# EAGLE board esp_ (EAGLE 7.5.0)
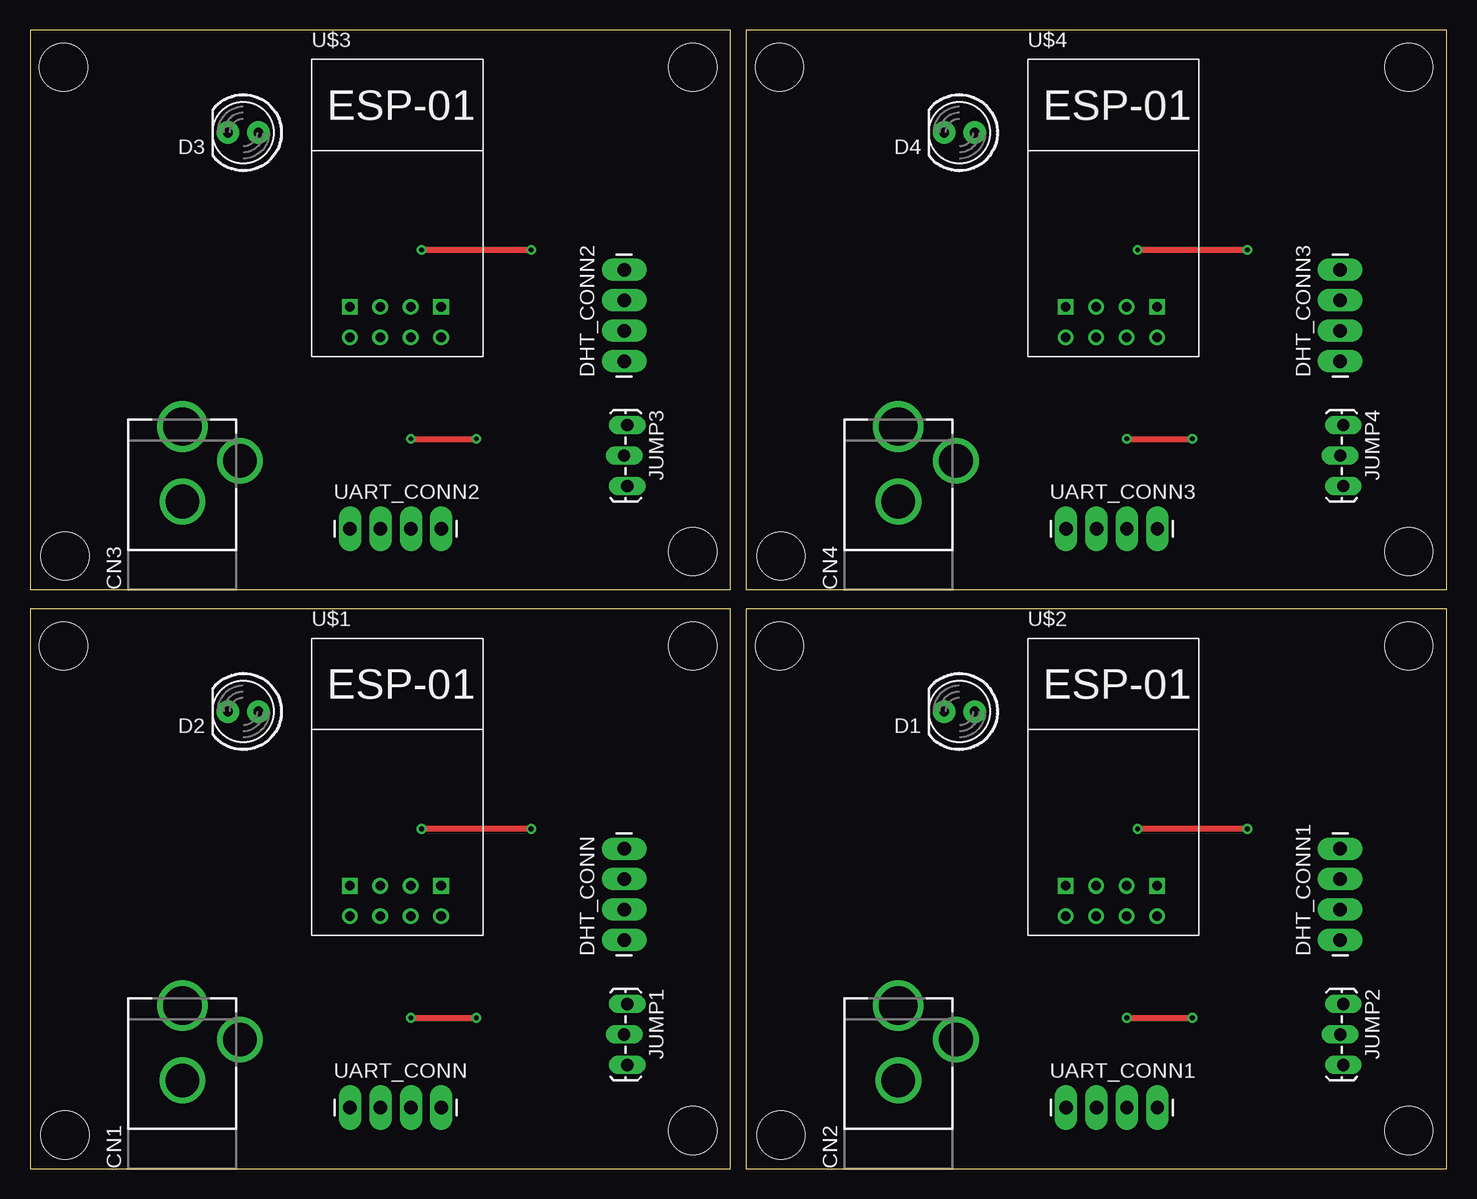
[diagram p0: board, top side]
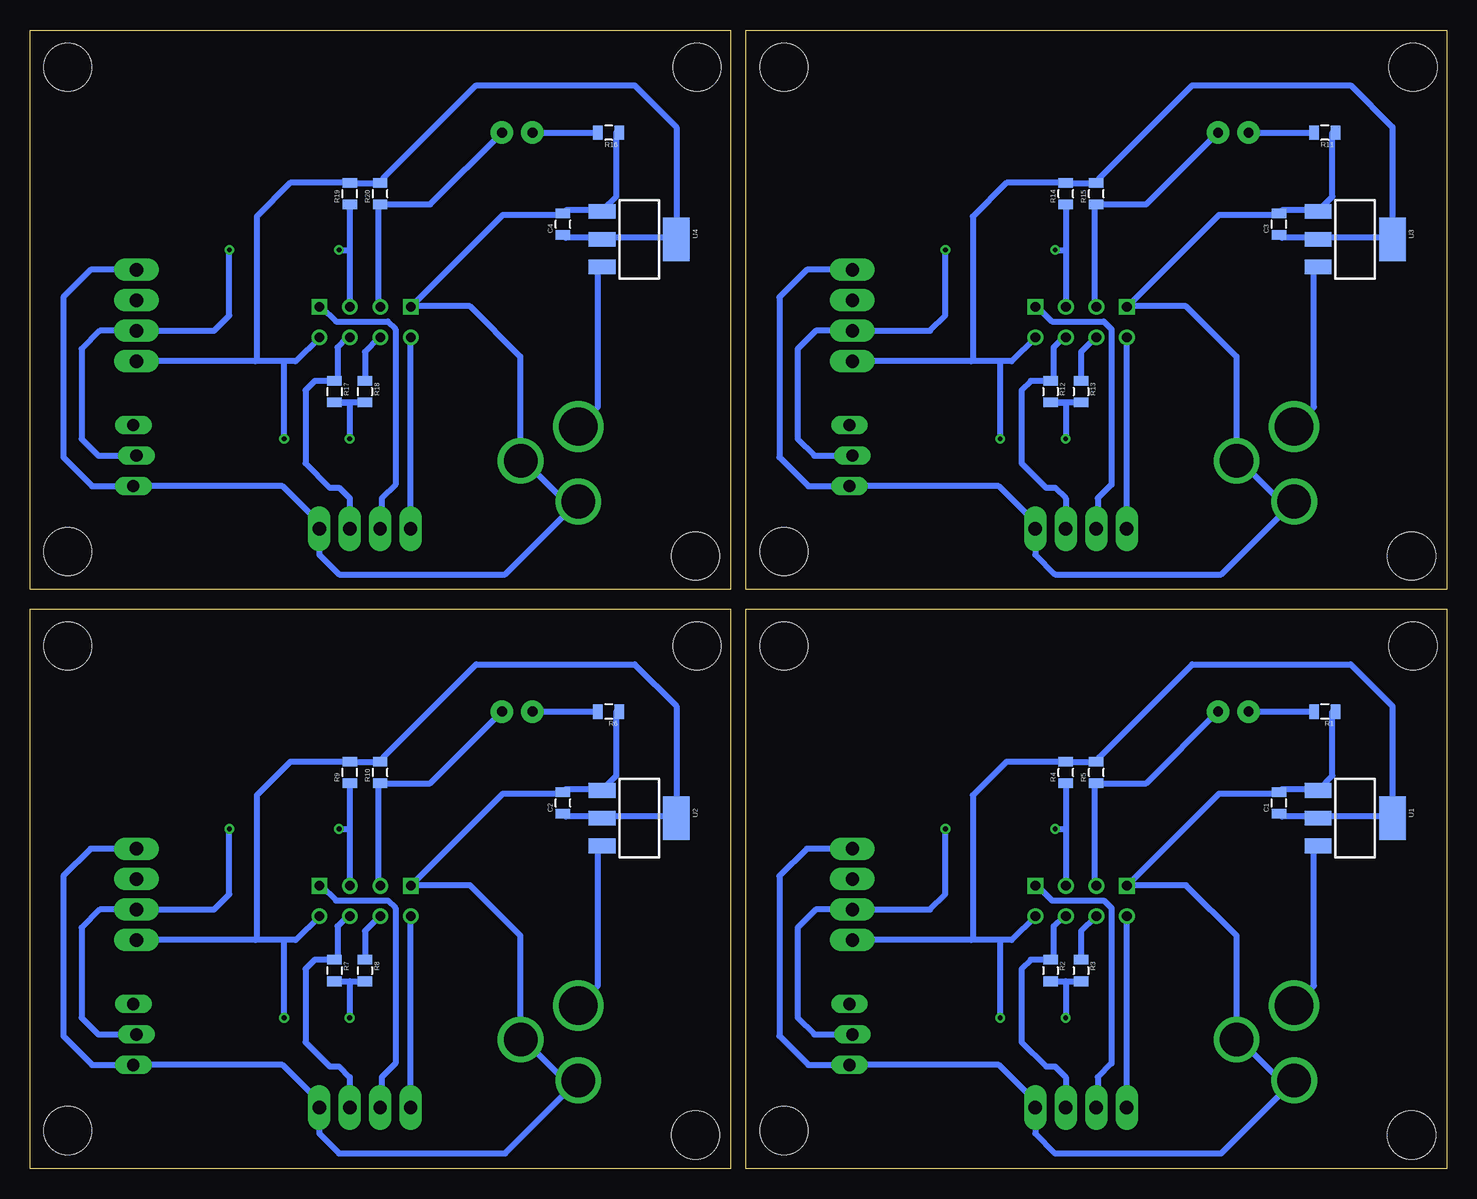
[diagram p1: board, bottom side, seen from below]

Size 118.09 x 94.92 mm. Coordinates in mm from the lower left corner, seen from the top.
Outline: 0,0 58.4,0 58.4,46.66 0,46.66 0,0
Outline: 59.69,0 118.09,0 118.09,46.66 59.69,46.66 59.69,0
Outline: 0,48.26 58.4,48.26 58.4,94.92 0,94.92 0,48.26
Outline: 59.69,48.26 118.09,48.26 118.09,94.92 59.69,94.92 59.69,48.26
Copper layers (1*16): Top 0.035mm / dielectric 1.5mm / Bottom 0.035mm
Design rules "default": minimum track width 10mil, minimum drill 24mil, track to track 8mil, track to pad 8mil, pad to pad 8mil, via to via 8mil, smd to smd 8mil, copper to edge 40mil, drill to drill 8mil, minimum pad ring 10mil, minimum via ring 8mil, stop-mask expansion 4mil, vias tented up to drill 0mil, thermal gap 10mil
Net classes: 0 default: width 0.508 mm, drill 0.254 mm, clearance 0.254 mm
Holes 4 mm at 2.79,43.56 55.24,43.56 55.24,3.17 2.92,2.79 62.48,43.56 114.94,43.56 114.94,3.17 62.61,2.79 2.79,91.82 55.24,91.82 55.24,51.44 2.92,51.05 62.48,91.82 114.94,91.82 114.94,51.44 62.61,51.05

## Footprints (pad centres in the part's own frame; a part is rotated, then mirrored left to right if it is on the bottom)
0805 = smd 0.8 x 1.2: 1 -0.9,0; 2 0.9,0
DCJACK_2MM_PTH = drill 2.8: GND 0,7.35; GNDBREAK 4.8,10.75 | drill 3.2: PWR 0,13.6
LED5MM = drill 0.813 pad 1.88: A -1.27,0; K 1.27,0
1X04_LONGPADS = drill 1.118 pad 1.88 long: 1 0,0; 2 2.54,0; 3 5.08,0; 4 7.62,0
1X03_LOCK_LONGPADS = drill 1.016 long: 1 0,0; 2 2.54,-0.254; 3 5.08,0
SOT223 = smd 1.219 x 2.235: 1 -2.311,-3.099; 2 0,-3.099; 3 2.311,-3.099 | smd 3.6 x 2.2: 4 0,3.099
ESP01 = drill 0.8: CH_PD -1.285,-8.178; GPIO0 1.255,-5.638; GPIO2 -1.285,-5.638; RST 1.255,-8.178; TX -3.825,-8.178; VCC 3.795,-8.178 | drill 0.8 square: GND -3.825,-5.638; RX 3.795,-5.638

## Placement (x,y rotation side)
C1  [0805]  13.97,30.48 90 bottom
C2  [0805]  73.66,30.48 90 bottom
C3  [0805]  13.97,78.74 90 bottom
C4  [0805]  73.66,78.74 90 bottom
CN1  [DCJACK_2MM_PTH]  12.7,0 0 top
CN2  [DCJACK_2MM_PTH]  72.39,0 0 top
CN3  [DCJACK_2MM_PTH]  12.7,48.26 0 top
CN4  [DCJACK_2MM_PTH]  72.39,48.26 0 top
D1  [LED5MM]  77.47,38.1 180 top
D2  [LED5MM]  17.78,38.1 180 top
D3  [LED5MM]  17.78,86.36 180 top
D4  [LED5MM]  77.47,86.36 180 top
DHT_CONN  [1X04_LONGPADS]  49.53,19.05 90 top
DHT_CONN1  [1X04_LONGPADS]  109.22,19.05 90 top
DHT_CONN2  [1X04_LONGPADS]  49.53,67.31 90 top
DHT_CONN3  [1X04_LONGPADS]  109.22,67.31 90 top
JUMP1  [1X03_LOCK_LONGPADS]  49.78,13.72 270 top
JUMP2  [1X03_LOCK_LONGPADS]  109.47,13.72 270 top
JUMP3  [1X03_LOCK_LONGPADS]  49.78,61.98 270 top
JUMP4  [1X03_LOCK_LONGPADS]  109.47,61.98 270 top
R1  100  [0805]  10.16,38.1 180 bottom
R2  4.7k  [0805]  33.02,16.51 270 bottom
R3  4.7k  [0805]  30.48,16.51 270 bottom
R4  4.7k  [0805]  31.75,33.02 90 bottom
R5  4.7k  [0805]  29.21,33.02 90 bottom
R6  100  [0805]  69.85,38.1 180 bottom
R7  4.7k  [0805]  92.71,16.51 270 bottom
R8  4.7k  [0805]  90.17,16.51 270 bottom
R9  4.7k  [0805]  91.44,33.02 90 bottom
R10  4.7k  [0805]  88.9,33.02 90 bottom
R11  100  [0805]  10.16,86.36 180 bottom
R12  4.7k  [0805]  33.02,64.77 270 bottom
R13  4.7k  [0805]  30.48,64.77 270 bottom
R14  4.7k  [0805]  31.75,81.28 90 bottom
R15  4.7k  [0805]  29.21,81.28 90 bottom
R16  100  [0805]  69.85,86.36 180 bottom
R17  4.7k  [0805]  92.71,64.77 270 bottom
R18  4.7k  [0805]  90.17,64.77 270 bottom
R19  4.7k  [0805]  91.44,81.28 90 bottom
R20  4.7k  [0805]  88.9,81.28 90 bottom
U1  [SOT223]  7.62,29.21 270 bottom
U2  [SOT223]  67.31,29.21 270 bottom
U3  [SOT223]  7.62,77.47 270 bottom
U4  [SOT223]  67.31,77.47 270 bottom
U$1  ESP01  [ESP01]  30.48,29.21 0 top
U$2  ESP01  [ESP01]  90.17,29.21 0 top
U$3  ESP01  [ESP01]  30.48,77.47 0 top
U$4  ESP01  [ESP01]  90.17,77.47 0 top
UART_CONN  [1X04_LONGPADS]  26.67,5.08 0 top
UART_CONN1  [1X04_LONGPADS]  86.36,5.08 0 top
UART_CONN2  [1X04_LONGPADS]  26.67,53.34 0 top
UART_CONN3  [1X04_LONGPADS]  86.36,53.34 0 top

## Library data of the parts
C1-C4 = SparkFun-Capacitors
CN1-CN4 = adafruit
D1-D4 = SparkFun-LED
DHT_CONN DHT_CONN1-DHT_CONN3 UART_CONN UART_CONN1-UART_CONN3 = SparkFun-Connectors; PROD_ID: CONN-09696
JUMP1-JUMP4 = SparkFun-Connectors
R1-R20 = SparkFun-Resistors
U1-U4 = SparkFun-PowerIC; PROD_ID: VREG-08170
U$1-U$4 = esp8266modules

## Nets
3.3V: C1.1 DHT_CONN.1 R2.2 R3.2 R4.2 R5.2 U1.2 U1.4 U$1.VCC
3.3V1: C2.1 DHT_CONN1.1 R7.2 R8.2 R9.2 R10.2 U2.2 U2.4 U$2.VCC
3.3V2: C3.1 DHT_CONN2.1 R12.2 R13.2 R14.2 R15.2 U3.2 U3.4 U$3.VCC
3.3V3: C4.1 DHT_CONN3.1 R17.2 R18.2 R19.2 R20.2 U4.2 U4.4 U$4.VCC
CH_PD: R3.1 U$1.CH_PD
CH_PD1: R8.1 U$2.CH_PD
CH_PD2: R13.1 U$3.CH_PD
CH_PD3: R18.1 U$4.CH_PD
GND: C1.2 CN1.GND CN1.GNDBREAK DHT_CONN.4 JUMP1.3 R1.1 U1.1 U$1.GND UART_CONN.4
GND1: C2.2 CN2.GND CN2.GNDBREAK DHT_CONN1.4 JUMP2.3 R6.1 U2.1 U$2.GND UART_CONN1.4
GND2: C3.2 CN3.GND CN3.GNDBREAK DHT_CONN2.4 JUMP3.3 R11.1 U3.1 U$3.GND UART_CONN2.4
GND3: C4.2 CN4.GND CN4.GNDBREAK DHT_CONN3.4 JUMP4.3 R16.1 U4.1 U$4.GND UART_CONN3.4
GPIO0: DHT_CONN.2 JUMP1.2 R4.1 U$1.GPIO0
GPIO1: DHT_CONN1.2 JUMP2.2 R9.1 U$2.GPIO0
GPIO2: D2.A R5.1 U$1.GPIO2
GPIO3: D1.A R10.1 U$2.GPIO2
GPIO4: DHT_CONN2.2 JUMP3.2 R14.1 U$3.GPIO0
GPIO5: D3.A R15.1 U$3.GPIO2
GPIO6: DHT_CONN3.2 JUMP4.2 R19.1 U$4.GPIO0
GPIO7: D4.A R20.1 U$4.GPIO2
N$1: D2.K R1.2
N$2: D1.K R6.2
N$3: JUMP1.1
N$4: JUMP2.1
N$5: D3.K R11.2
N$6: JUMP3.1
N$7: D4.K R16.2
N$8: JUMP4.1
NC: DHT_CONN.3
NC1: DHT_CONN1.3
NC2: DHT_CONN2.3
NC3: DHT_CONN3.3
RESET: R2.1 U$1.RST UART_CONN.3
RESET1: R7.1 U$2.RST UART_CONN1.3
RESET2: R12.1 U$3.RST UART_CONN2.3
RESET3: R17.1 U$4.RST UART_CONN3.3
RX: U$1.RX UART_CONN.2
RX1: U$2.RX UART_CONN1.2
RX2: U$3.RX UART_CONN2.2
RX3: U$4.RX UART_CONN3.2
TX: U$1.TX UART_CONN.1
TX1: U$2.TX UART_CONN1.1
TX2: U$3.TX UART_CONN2.1
TX3: U$4.TX UART_CONN3.1
VCC: CN1.PWR U1.3
VCC1: CN2.PWR U2.3
VCC2: CN3.PWR U3.3
VCC3: CN4.PWR U4.3

## Tracks (layer width: path | path; a pad name or v marks a point on that pad's centre or on a via)
3.3V  (via drill 0.4 pad 0.5)
  Top 0.508: v31.75,12.57 v37.21,12.57
  Bottom 0.508: R3.2 30.48,15.62 32.77,15.62 R2.2 31.75,15.61 v31.75,12.57 | C1.1 13.72,29.34 11.05,29.34 U1.2 10.67,29.34 4.57,29.34 U1.4 4.52,38.56 8,42.04 21.21,42.04 28.96,34.29 R5.2 29.34,33.91 31.62,33.91 R4.2 36.69,33.92 39.5,31.11 39.5,19.18 39.62,19.05 | U$1.VCC 36.26,19.05 37.21,19.05 | 37.21,19.05 39.62,19.05 | 39.62,19.05 DHT_CONN.1 | v37.21,12.57 37.21,19.05
3.3V1  (via drill 0.4 pad 0.5)
  Top 0.508: v91.44,12.57 v96.9,12.57
  Bottom 0.508: R8.2 90.17,15.62 92.46,15.62 R7.2 91.44,15.61 v91.44,12.57 | C2.1 73.41,29.34 70.74,29.34 U2.2 70.36,29.34 64.26,29.34 U2.4 64.21,38.56 67.69,42.04 80.9,42.04 88.65,34.29 R10.2 89.03,33.91 91.31,33.91 R9.2 96.38,33.92 99.19,31.11 99.19,19.18 99.31,19.05 | U$2.VCC 95.95,19.05 96.9,19.05 | 96.9,19.05 99.31,19.05 | 99.31,19.05 DHT_CONN1.1 | v96.9,12.57 96.9,19.05
3.3V2  (via drill 0.4 pad 0.5)
  Top 0.508: v31.75,60.83 v37.21,60.83
  Bottom 0.508: R13.2 30.48,63.88 32.77,63.88 R12.2 31.75,63.87 v31.75,60.83 | C3.1 13.72,77.6 11.05,77.6 U3.2 10.67,77.6 4.57,77.6 U3.4 4.52,86.82 8,90.3 21.21,90.3 28.96,82.55 R15.2 29.34,82.17 31.62,82.17 R14.2 36.69,82.18 39.5,79.38 39.5,67.44 39.62,67.31 | U$3.VCC 36.26,67.31 37.21,67.31 | 37.21,67.31 39.62,67.31 | 39.62,67.31 DHT_CONN2.1 | v37.21,60.83 37.21,67.31
3.3V3  (via drill 0.4 pad 0.5)
  Top 0.508: v91.44,60.83 v96.9,60.83
  Bottom 0.508: R18.2 90.17,63.88 92.46,63.88 R17.2 91.44,63.87 v91.44,60.83 | C4.1 73.41,77.6 70.74,77.6 U4.2 70.36,77.6 64.26,77.6 U4.4 64.21,86.82 67.69,90.3 80.9,90.3 88.65,82.55 R20.2 89.03,82.17 91.31,82.17 R19.2 96.38,82.18 99.19,79.38 99.19,67.44 99.31,67.31 | U$4.VCC 95.95,67.31 96.9,67.31 | 96.9,67.31 99.31,67.31 | 99.31,67.31 DHT_CONN3.1 | v96.9,60.83 96.9,67.31
CH_PD
  Bottom 0.508: R3.1 30.48,19.81 29.34,20.95 U$1.CH_PD
CH_PD1
  Bottom 0.508: R8.1 90.17,19.81 89.03,20.95 U$2.CH_PD
CH_PD2
  Bottom 0.508: R13.1 30.48,68.07 29.34,69.21 U$3.CH_PD
CH_PD3
  Bottom 0.508: R18.1 90.17,68.07 89.03,69.21 U$4.CH_PD
GND
  Bottom 0.508: R1.1 9.53,38.1 9.53,32.77 10.67,31.62 U1.1 11.05,31.62 13.72,31.62 C1.2 14.1,31.24 18.98,31.24 U$1.GND 26.29,23.62 21.72,23.62 17.53,19.43 17.53,11.05 CN1.GNDBREAK 17.14,10.67 14.1,7.62 12.95,7.62 CN1.GND 18.78,1.27 32.64,1.27 34.29,2.92 UART_CONN.4 34.29,5.59 37.34,8.64 JUMP1.3 53.21,8.64 55.63,11.05 55.63,24.38 53.34,26.67 DHT_CONN.4
GND1
  Bottom 0.508: R6.1 69.22,38.1 69.22,32.77 70.36,31.62 U2.1 70.74,31.62 73.41,31.62 C2.2 73.79,31.24 78.67,31.24 U$2.GND 85.98,23.62 81.41,23.62 77.22,19.43 77.22,11.05 CN2.GNDBREAK 76.83,10.67 73.79,7.62 72.64,7.62 CN2.GND 78.47,1.27 92.33,1.27 93.98,2.92 UART_CONN1.4 93.98,5.59 97.03,8.64 JUMP2.3 112.9,8.64 115.32,11.05 115.32,24.38 113.03,26.67 DHT_CONN1.4
GND2
  Bottom 0.508: R11.1 9.53,86.36 9.53,81.03 10.67,79.88 U3.1 11.05,79.88 13.72,79.88 C3.2 14.1,79.5 18.98,79.5 U$3.GND 26.29,71.88 21.72,71.88 17.53,67.69 17.53,59.31 CN3.GNDBREAK 17.14,58.93 14.1,55.88 12.95,55.88 CN3.GND 18.78,49.53 32.64,49.53 34.29,51.18 UART_CONN2.4 34.29,53.85 37.34,56.9 JUMP3.3 53.21,56.9 55.63,59.31 55.63,72.64 53.34,74.93 DHT_CONN2.4
GND3
  Bottom 0.508: R16.1 69.22,86.36 69.22,81.03 70.36,79.88 U4.1 70.74,79.88 73.41,79.88 C4.2 73.79,79.5 78.67,79.5 U$4.GND 85.98,71.88 81.41,71.88 77.22,67.69 77.22,59.31 CN4.GNDBREAK 76.83,58.93 73.79,55.88 72.64,55.88 CN4.GND 78.47,49.53 92.33,49.53 93.98,51.18 UART_CONN3.4 93.98,53.85 97.03,56.9 JUMP4.3 112.9,56.9 115.32,59.31 115.32,72.64 113.03,74.93 DHT_CONN3.4
GPIO0  (via drill 0.4 pad 0.5)
  Top 0.508: v41.78,28.32 v32.64,28.32
  Bottom 0.508: JUMP1.2 52.7,11.18 54.1,12.57 54.1,20.07 52.58,21.59 DHT_CONN.2 43.05,21.59 41.78,22.86 v41.78,28.32 | R4.1 31.75,28.32 | 31.75,28.32 31.75,23.59 U$1.GPIO0 | v32.64,28.32 31.75,28.32
GPIO1  (via drill 0.4 pad 0.5)
  Top 0.508: v101.47,28.32 v92.33,28.32
  Bottom 0.508: JUMP2.2 112.39,11.18 113.79,12.57 113.79,20.07 112.27,21.59 DHT_CONN1.2 102.74,21.59 101.47,22.86 v101.47,28.32 | R9.1 91.44,28.32 | 91.44,28.32 91.44,23.59 U$2.GPIO0 | v92.33,28.32 91.44,28.32
GPIO2
  Bottom 0.508: U$1.GPIO2 29.34,23.62 29.34,32 R5.1 25.03,32.12 D2.A
GPIO3
  Bottom 0.508: U$2.GPIO2 89.03,23.62 89.03,32 R10.1 84.72,32.12 D1.A
GPIO4  (via drill 0.4 pad 0.5)
  Top 0.508: v41.78,76.58 v32.64,76.58
  Bottom 0.508: JUMP3.2 52.7,59.44 54.1,60.83 54.1,68.33 52.58,69.85 DHT_CONN2.2 43.05,69.85 41.78,71.12 v41.78,76.58 | R14.1 31.75,76.58 | 31.75,76.58 31.75,71.85 U$3.GPIO0 | v32.64,76.58 31.75,76.58
GPIO5
  Bottom 0.508: U$3.GPIO2 29.34,71.88 29.34,80.26 R15.1 25.03,80.38 D3.A
GPIO6  (via drill 0.4 pad 0.5)
  Top 0.508: v101.47,76.58 v92.33,76.58
  Bottom 0.508: JUMP4.2 112.39,59.44 113.79,60.83 113.79,68.33 112.27,69.85 DHT_CONN3.2 102.74,69.85 101.47,71.12 v101.47,76.58 | R19.1 91.44,76.58 | 91.44,76.58 91.44,71.85 U$4.GPIO0 | v92.33,76.58 91.44,76.58
GPIO7
  Bottom 0.508: U$4.GPIO2 89.03,71.88 89.03,80.26 R20.1 84.72,80.38 D4.A
N$1
  Bottom 0.508: D2.K R1.2
N$2
  Bottom 0.508: D1.K R6.2
N$5
  Bottom 0.508: D3.K R11.2
N$7
  Bottom 0.508: D4.K R16.2
RESET
  Bottom 0.508: U$1.RST 32,20.95 32.77,20.19 32.77,17.53 R2.1 34.66,17.41 35.43,16.64 35.43,10.54 33.4,8.51 32.64,8.51 31.75,7.62 UART_CONN.3
RESET1
  Bottom 0.508: U$2.RST 91.69,20.95 92.46,20.19 92.46,17.53 R7.1 94.35,17.41 95.12,16.64 95.12,10.54 93.09,8.51 92.33,8.51 91.44,7.62 UART_CONN1.3
RESET2
  Bottom 0.508: U$3.RST 32,69.21 32.77,68.45 32.77,65.79 R12.1 34.66,65.67 35.43,64.9 35.43,58.8 33.4,56.77 32.64,56.77 31.75,55.88 UART_CONN2.3
RESET3
  Bottom 0.508: U$4.RST 91.69,69.21 92.46,68.45 92.46,65.79 R17.1 94.35,65.67 95.12,64.9 95.12,58.8 93.09,56.77 92.33,56.77 91.44,55.88 UART_CONN3.3
RX
  Bottom 0.508: U$1.RX 34.11,23.57 32.89,22.35 28.57,22.35 27.94,21.72 27.94,8.76 29.08,7.62 29.08,5.21 UART_CONN.2
RX1
  Bottom 0.508: U$2.RX 93.8,23.57 92.58,22.35 88.27,22.35 87.63,21.72 87.63,8.76 88.77,7.62 88.77,5.21 UART_CONN1.2
RX2
  Bottom 0.508: U$3.RX 34.11,71.83 32.89,70.61 28.57,70.61 27.94,69.98 27.94,57.02 29.08,55.88 29.08,53.47 UART_CONN2.2
RX3
  Bottom 0.508: U$4.RX 93.8,71.83 92.58,70.61 88.27,70.61 87.63,69.98 87.63,57.02 88.77,55.88 88.77,53.47 UART_CONN3.2
TX
  Bottom 0.508: UART_CONN.1 26.67,20.95 U$1.TX
TX1
  Bottom 0.508: UART_CONN1.1 86.36,20.95 U$2.TX
TX2
  Bottom 0.508: UART_CONN2.1 26.67,69.21 U$3.TX
TX3
  Bottom 0.508: UART_CONN3.1 86.36,69.21 U$4.TX
VCC
  Bottom 0.508: U1.3 11.05,26.67 11.05,15.24 12.57,13.72 CN1.PWR
VCC1
  Bottom 0.508: U2.3 70.74,26.67 70.74,15.24 72.26,13.72 CN2.PWR
VCC2
  Bottom 0.508: U3.3 11.05,74.93 11.05,63.5 12.57,61.98 CN3.PWR
VCC3
  Bottom 0.508: U4.3 70.74,74.93 70.74,63.5 72.26,61.98 CN4.PWR